# Altium PCB GANDHVEDH_Ammonia.PcbDoc (part 2 of 2)
Units mil, origin at the board's own origin, x right, y up, seen from the top; angles counter-clockwise.
Board outline 3700.79 x 3700.79 mil, 2 copper layers (Top Layer, Bottom Layer); 98 components, 57 nets, 314 pads, 1596 vias.
Unrouted connection lines stored in the file: 13.
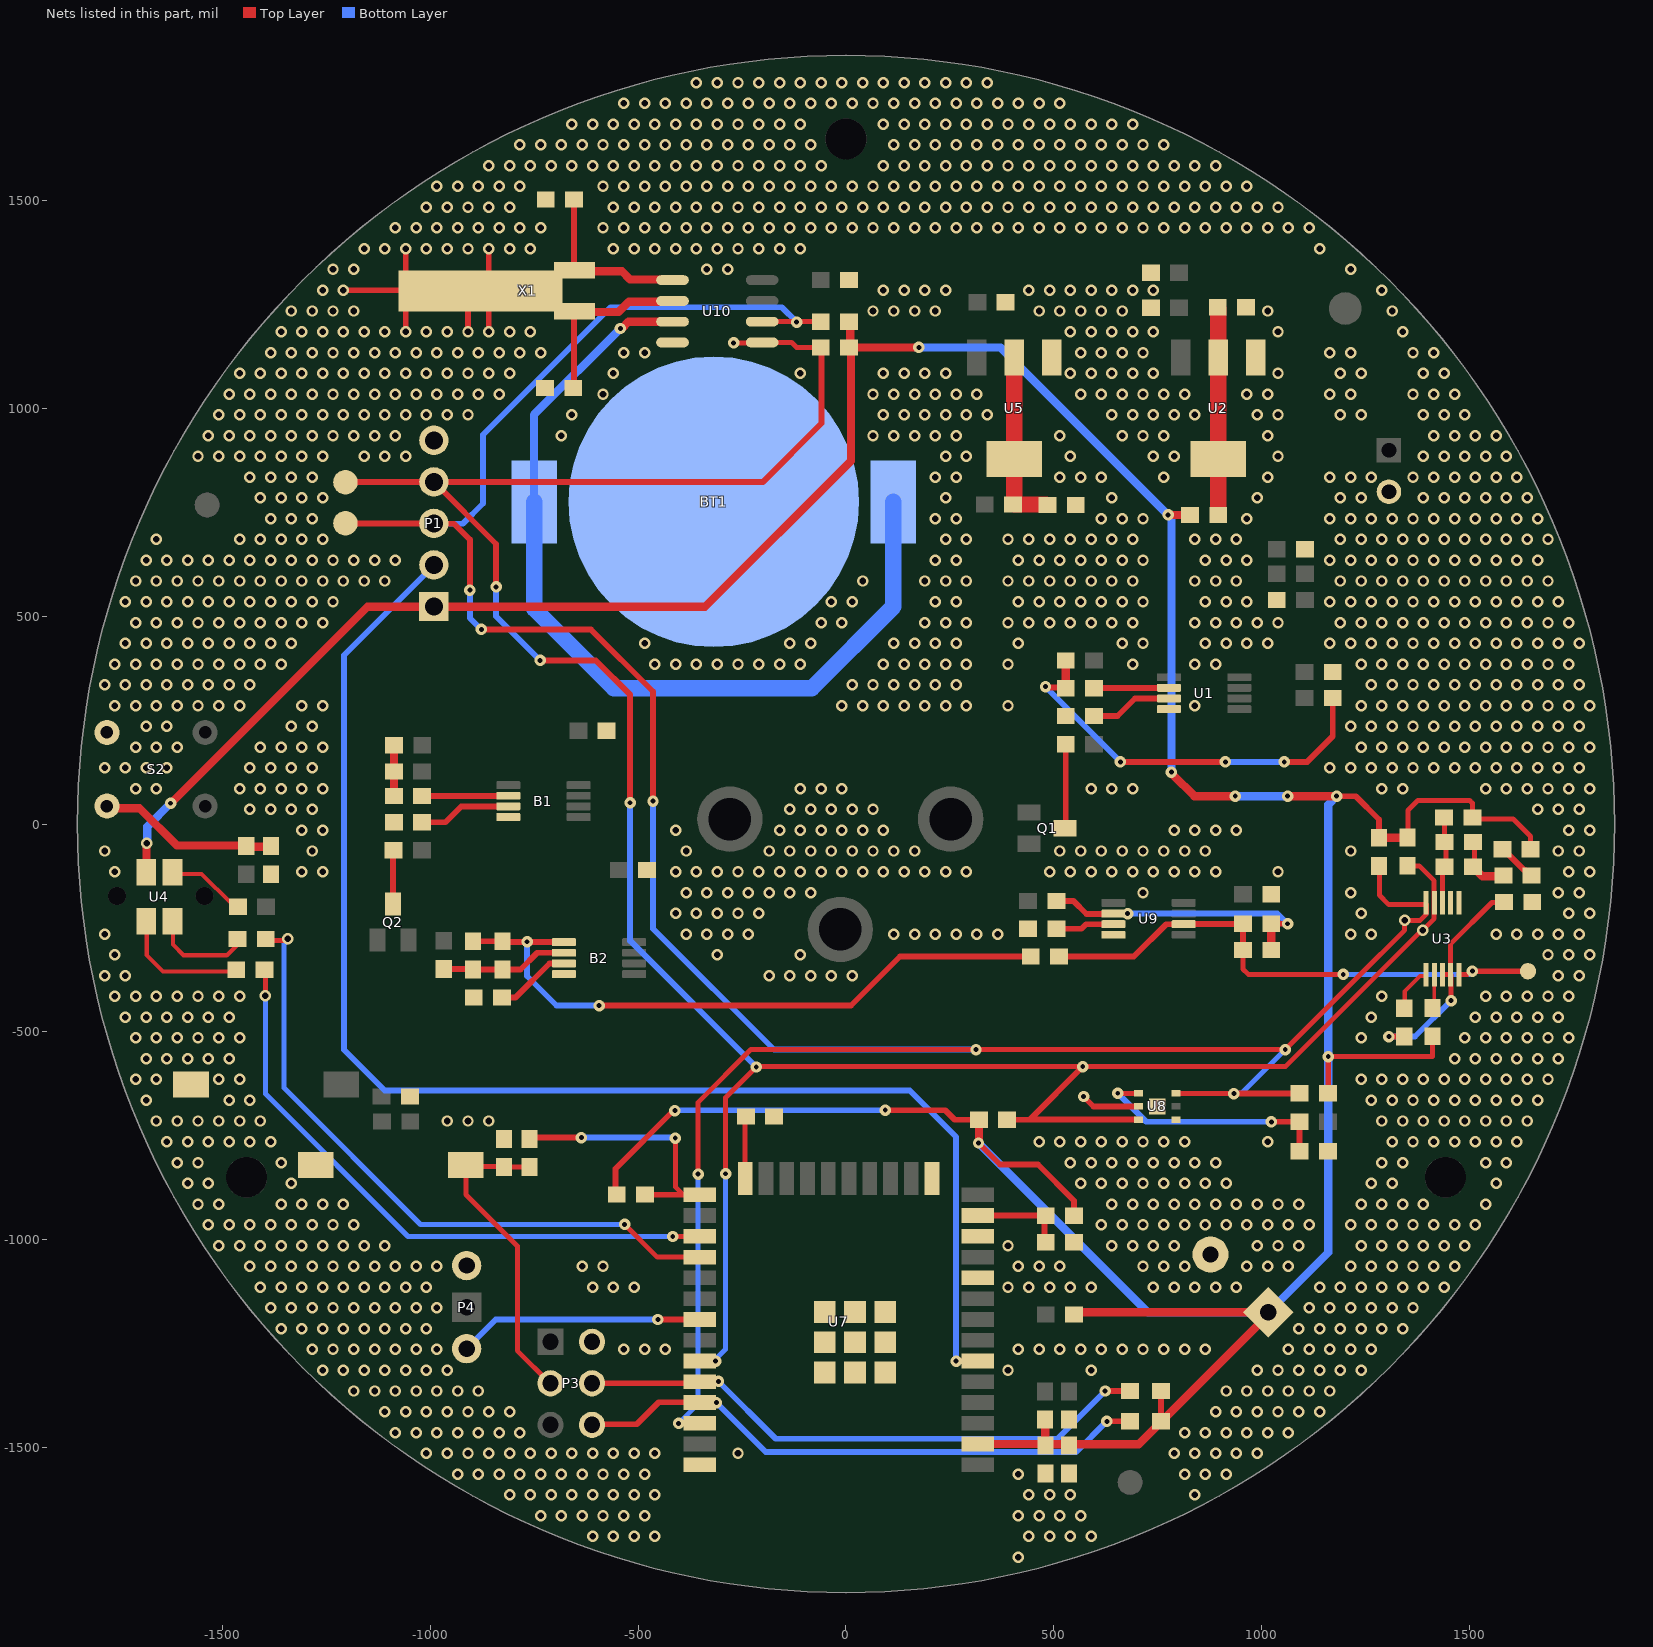
[diagram p2: the nets of this part, all layers, seen from the top]

## Via types
v1: diameter 27.56, hole 15.75, Top Layer to Bottom Layer, tented both sides, 1503 vias
v2: diameter 27.56, hole 11.81, Top Layer to Bottom Layer, tented both sides, 81 vias
v3: diameter 23.62, hole 7.87, Top Layer to Bottom Layer, 12 vias

## Nets (pads, with @x,y where several pads share a name; then routed paths per layer and width w, separated by ;. In a path a pad name is that pad's centre, name@x,y a point inside that pad or via, vN(x,y) a via of type N, cw(c..) or ccw(c..) an arc to the next point about the centre after c; other vN are vias at no path point) (continued)
GND_POWER: B1.4 B2.4 BT1.2 C1.1 C2.1 C3.1 C4.2 C5.2 C8.1 C9.2 C11.2 C13.2 C14.1 C15.1 C16.1 C17.1 C18.2 C19.1 C20.1 C21.1 C23.1 C24.1 C26.2 C27.2 C28.2 C29.2 FB2.2 P1.1 P2.2 P3.5 P4.3 R1.2 R8.2 R12.2 R18.2 R22.2 R27.1 R37.2 S1.2 S2.4 S3.2 U1.4 U2.1 U3.6 U3.7 U5.1 U7.15 U7.38 U7.39 U8.2 U8.4 U8.7 U9.4 U10.4 X1.3 | length 1098.8
  Top Layer w7.87: R12.2@1652.45,-188 R12.2@1653,-188.55
  Top Layer w14: v1(-1210,1285) X1.3@-1062,1285 ; v1(-1060,1185) -1060,1283 X1.3@-1062,1285 ; v1(-1060,1385) -1060,1287 X1.3@-1062,1285 ; v1(-910,1185) -910,1253.39 X1.3@-879.92,1283.46 ; v1(-860,1185) -860,1263.54 X1.3@-879.92,1283.46 ; v1(-860,1385) -860,1303.39 X1.3@-879.92,1283.46 ; v2(572,-656) 596,-680 U8.2@703.72,-680 ; C1.1@1580.05,-60.9 1582.05,-60.9 1632.55,-111.4 1638.03,-111.4 FB2.2@1650.53,-123.9 ; X1.3@-1062,1285 -881.46,1285 X1.3@-879.92,1283.46
  other v1: 415,-1765 -610,-1715 -560,-1715 -510,-1715 -460,-1715 440,-1715 490,-1715 540,-1715 590,-1715 -735,-1665 -685,-1665 -635,-1665 -585,-1665 -535,-1665 -485,-1665 415,-1665 465,-1665 515,-1665 565,-1665 -810,-1615 -760,-1615 -710,-1615 -660,-1615 -610,-1615 -560,-1615 -510,-1615 -460,-1615 440,-1615 490,-1615 540,-1615 840,-1615 -935,-1565 -885,-1565 -835,-1565 -785,-1565 -735,-1565 -685,-1565 -635,-1565 -585,-1565 -535,-1565 -485,-1565 415,-1565 815,-1565 865,-1565 915,-1565 -1010,-1515 -960,-1515 -910,-1515 -860,-1515 -810,-1515 -760,-1515 -710,-1515 -660,-1515 -610,-1515 -560,-1515 -510,-1515 -460,-1515 -260,-1515 790,-1515 840,-1515 890,-1515 940,-1515 990,-1515 -1085,-1465 -1035,-1465 -985,-1465 -935,-1465 -885,-1465 -835,-1465 -785,-1465 815,-1465 865,-1465 915,-1465 965,-1465 1015,-1465 1065,-1465 -1110,-1415 -1060,-1415 -1010,-1415 -960,-1415 -910,-1415 -860,-1415 -810,-1415 890,-1415 940,-1415 990,-1415 1040,-1415 1090,-1415 1140,-1415 -1185,-1365 -1135,-1365 -1085,-1365 -1035,-1365 -985,-1365 -935,-1365 -885,-1365 915,-1365 965,-1365 1015,-1365 1065,-1365 1115,-1365 1165,-1365 -1260,-1315 -1210,-1315 -1160,-1315 -1110,-1315 -1060,-1315 -1010,-1315 -960,-1315 390,-1315 590,-1315 990,-1315 1040,-1315 1090,-1315 1140,-1315 1190,-1315 1240,-1315 -1285,-1265 -1235,-1265 -1185,-1265 -1135,-1265 -1085,-1265 -1035,-1265 -985,-1265 -535,-1265 -485,-1265 -435,-1265 415,-1265 465,-1265 515,-1265 565,-1265 615,-1265 665,-1265 715,-1265 765,-1265 815,-1265 865,-1265 1065,-1265 1115,-1265 1165,-1265 1215,-1265 1265,-1265 -1360,-1215 -1310,-1215 -1260,-1215 -1210,-1215 -1160,-1215 -1110,-1215 -1060,-1215 -1010,-1215 1090,-1215 1140,-1215 1190,-1215 1240,-1215 1290,-1215 1340,-1215 -1385,-1165 -1335,-1165 -1285,-1165 -1235,-1165 -1185,-1165 -1135,-1165 -1085,-1165 -1035,-1165 -985,-1165 1115,-1165 1165,-1165 1215,-1165 1265,-1165 1315,-1165 1365,-1165 -1410,-1115 -1360,-1115 -1310,-1115 -1260,-1115 -1210,-1115 -1160,-1115 -1110,-1115 -1060,-1115 -1010,-1115 -610,-1115 -560,-1115 -510,-1115 390,-1115 440,-1115 490,-1115 540,-1115 590,-1115 740,-1115 790,-1115 840,-1115 890,-1115 940,-1115 1140,-1115 1190,-1115 1240,-1115 1290,-1115 1340,-1115 1390,-1115 1440,-1115 -1435,-1065 -1385,-1065 -1335,-1065 -1285,-1065 -1235,-1065 -1185,-1065 -1135,-1065 -1085,-1065 -1035,-1065 -985,-1065 -635,-1065 -585,-1065 415,-1065 465,-1065 515,-1065 715,-1065 765,-1065 815,-1065 965,-1065 1015,-1065 1065,-1065 1215,-1065 1265,-1065 1315,-1065 1365,-1065 1415,-1065 1465,-1065 -1510,-1015 -1460,-1015 -1410,-1015 -1360,-1015 -1310,-1015 -1260,-1015 -1210,-1015 -1160,-1015 -1110,-1015 390,-1015 640,-1015 690,-1015 740,-1015 790,-1015 990,-1015 1040,-1015 1090,-1015 1240,-1015 1290,-1015 1340,-1015 1390,-1015 1440,-1015 1490,-1015 -1535,-965 -1485,-965 -1435,-965 -1385,-965 -1335,-965 -1285,-965 -1235,-965 -1185,-965 615,-965 665,-965 715,-965 765,-965 815,-965 865,-965 915,-965 965,-965 1015,-965 1065,-965 1115,-965 1215,-965 1265,-965 1315,-965 1365,-965 1415,-965 1465,-965 1515,-965 -1560,-915 -1510,-915 -1360,-915 -1310,-915 -1260,-915 -1210,-915 640,-915 690,-915 740,-915 790,-915 840,-915 890,-915 940,-915 990,-915 1040,-915 1090,-915 1240,-915 1290,-915 1340,-915 1390,-915 1540,-915 -1585,-865 -1535,-865 -1335,-865 565,-865 615,-865 665,-865 715,-865 765,-865 815,-865 865,-865 915,-865 1265,-865 1315,-865 1565,-865 -1610,-815 -1560,-815 -1360,-815 540,-815 590,-815 640,-815 690,-815 740,-815 790,-815 840,-815 890,-815 1290,-815 1340,-815 1540,-815 1590,-815 -1635,-765 -1585,-765 -1535,-765 -1485,-765 -1435,-765 -1385,-765 465,-765 515,-765 565,-765 615,-765 665,-765 715,-765 765,-765 815,-765 1015,-765 1315,-765 1365,-765 1415,-765 1465,-765 1515,-765 1565,-765 1615,-765 -1660,-715 -1610,-715 -1560,-715 -1510,-715 -1460,-715 -1410,-715 -960,-715 -910,-715 -860,-715 1290,-715 1340,-715 1390,-715 1440,-715 1490,-715 1540,-715 1590,-715 1640,-715 -1685,-665 -1485,-665 -1435,-665 1265,-665 1315,-665 1365,-665 1415,-665 1465,-665 1515,-665 1565,-665 1615,-665 1665,-665 -1710,-615 -1660,-615 -1510,-615 -1460,-615 1240,-615 1290,-615 1340,-615 1390,-615 1440,-615 1490,-615 1540,-615 1590,-615 1640,-615 1690,-615 -1685,-565 -1635,-565 -1585,-565 -1535,-565 -1485,-565 1465,-565 1515,-565 1565,-565 1615,-565 1665,-565 1715,-565 -1710,-515 -1660,-515 -1610,-515 -1560,-515 -1510,-515 -1460,-515 1240,-515 1490,-515 1540,-515 1590,-515 1640,-515 1690,-515 1740,-515 -1735,-465 -1685,-465 -1635,-465 -1585,-465 -1535,-465 -1485,-465 1265,-465 1515,-465 1565,-465 1615,-465 1665,-465 1715,-465 -1760,-415 -1710,-415 -1660,-415 -1610,-415 -1560,-415 -1510,-415 -1460,-415 1290,-415 1540,-415 1590,-415 1640,-415 1690,-415 1740,-415 -1785,-365 -1735,-365 -185,-365 -135,-365 -85,-365 -35,-365 15,-365 1715,-365 1765,-365 -1760,-315 -310,-315 -110,-315 1690,-315 1740,-315 1790,-315 -1785,-265 -385,-265 -335,-265 -285,-265 -235,-265 115,-265 165,-265 215,-265 265,-265 315,-265 365,-265 1215,-265 1265,-265 1565,-265 1615,-265 1665,-265 1715,-265 1765,-265 -410,-215 -360,-215 -310,-215 -260,-215 -210,-215 1240,-215 1740,-215 1790,-215 -385,-165 -335,-165 -285,-165 -235,-165 -185,-165 -135,-165 -85,-165 715,-165 1215,-165 1715,-165 1765,-165 -1760,-115 -1310,-115 -1260,-115 -410,-115 -360,-115 -310,-115 -260,-115 -210,-115 -160,-115 -110,-115 -60,-115 -10,-115 40,-115 90,-115 140,-115 190,-115 240,-115 290,-115 490,-115 540,-115 590,-115 640,-115 690,-115 740,-115 790,-115 840,-115 890,-115 1040,-115 1740,-115 1790,-115 -1785,-65 -1285,-65 -385,-65 -185,-65 -135,-65 -85,-65 -35,-65 15,-65 65,-65 115,-65 165,-65 515,-65 565,-65 615,-65 665,-65 715,-65 765,-65 815,-65 865,-65 1215,-65 1715,-65 1765,-65 -1310,-15 -1260,-15 -410,-15 -160,-15 -110,-15 -60,-15 -10,-15 40,-15 90,-15 790,-15 840,-15 890,-15 940,-15 1740,-15 1790,-15 -1435,35 -1385,35 -1335,35 -1285,35 -135,35 -85,35 -35,35 15,35 65,35 1665,35 1715,35 1765,35 -1710,85 -1660,85 -1460,85 -1410,85 -1360,85 -1310,85 -1260,85 -110,85 -60,85 -10,85 590,85 640,85 690,85 1290,85 1340,85 1540,85 1590,85 1640,85 1690,85 1740,85 1790,85 -1785,135 -1735,135 -1685,135 -1635,135 -1435,135 -1385,135 -1335,135 -1285,135 1165,135 1215,135 1265,135 1315,135 1365,135 1415,135 1465,135 1515,135 1565,135 1615,135 1665,135 1715,135 1765,135 -1710,185 -1660,185 -1610,185 -1410,185 -1360,185 -1310,185 -1260,185 1240,185 1290,185 1340,185 1390,185 1440,185 1490,185 1540,185 1590,185 1640,185 1690,185 1740,185 1790,185 -1685,235 -1635,235 -1335,235 -1285,235 1215,235 1265,235 1315,235 1365,235 1415,235 1465,235 1515,235 1565,235 1615,235 1665,235 1715,235 1765,235 -1760,285 -1710,285 -1660,285 -1610,285 -1560,285 -1510,285 -1460,285 -1310,285 -1260,285 -10,285 40,285 90,285 140,285 190,285 240,285 290,285 390,285 840,285 1240,285 1290,285 1340,285 1390,285 1440,285 1490,285 1540,285 1590,285 1640,285 1690,285 1740,285 1790,285 -1785,335 -1735,335 -1685,335 -1635,335 -1585,335 -1535,335 -1485,335 -1435,335 15,335 65,335 115,335 165,335 215,335 265,335 1265,335 1315,335 1365,335 1415,335 1465,335 1515,335 1565,335 1615,335 1665,335 1715,335 1765,335 -1760,385 -1710,385 -1660,385 -1610,385 -1560,385 -1510,385 -1460,385 -1410,385 -1360,385 -460,385 -410,385 -360,385 -310,385 -260,385 -210,385 -160,385 -110,385 90,385 140,385 190,385 240,385 290,385 390,385 690,385 840,385 890,385 1240,385 1290,385 1340,385 1390,385 1440,385 1490,385 1540,385 1590,385 1640,385 1690,385 1740,385 -1735,435 -1685,435 -1635,435 -1585,435 -1535,435 -1485,435 -1435,435 -1385,435 -1335,435 -485,435 -135,435 -85,435 115,435 165,435 215,435 265,435 415,435 665,435 715,435 865,435 915,435 965,435 1015,435 1165,435 1215,435 1265,435 1315,435 1365,435 1415,435 1465,435 1515,435 1565,435 1615,435 1665,435 1715,435 1765,435 -1710,485 -1660,485 -1610,485 -1560,485 -1510,485 -1460,485 -1410,485 -1360,485 -1310,485 -1260,485 -60,485 -10,485 190,485 240,485 290,485 390,485 440,485 490,485 540,485 590,485 640,485 690,485 840,485 890,485 940,485 990,485 1040,485 1190,485 1240,485 1290,485 1340,485 1390,485 1440,485 1490,485 1540,485 1590,485 1640,485 1690,485 1740,485 -1735,535 -1685,535 -1635,535 -1585,535 -1535,535 -1485,535 -1435,535 -1385,535 -1335,535 -1285,535 -1235,535 -35,535 15,535 215,535 265,535 415,535 465,535 515,535 565,535 615,535 665,535 715,535 865,535 915,535 965,535 1165,535 1215,535 1265,535 1315,535 1365,535 1415,535 1465,535 1515,535 1565,535 1615,535 1665,535 1715,535 -1710,585 -1660,585 -1610,585 -1560,585 -1510,585 -1460,585 -1410,585 -1360,585 -1310,585 -1260,585 -1210,585 -1160,585 -1110,585 40,585 190,585 240,585 290,585 390,585 440,585 490,585 540,585 590,585 640,585 690,585 840,585 890,585 940,585 1190,585 1240,585 1290,585 1340,585 1390,585 1440,585 1490,585 1540,585 1590,585 1640,585 1690,585 -1685,635 -1635,635 -1585,635 -1535,635 -1485,635 -1435,635 -1385,635 -1335,635 -1285,635 -1235,635 -1185,635 -1135,635 -1085,635 215,635 265,635 415,635 465,635 515,635 565,635 615,635 665,635 715,635 865,635 915,635 965,635 1165,635 1215,635 1265,635 1315,635 1365,635 1415,635 1465,635 1515,635 1565,635 1615,635 1665,635 -1660,685 -1460,685 -1410,685 -1360,685 -1310,685 -1260,685 240,685 290,685 390,685 440,685 490,685 540,685 590,685 640,685 690,685 840,685 890,685 940,685 1190,685 1240,685 1290,685 1340,685 1390,685 1440,685 1490,685 1540,685 1590,685 1640,685 1690,685 -1385,735 -1335,735 -1285,735 215,735 265,735 615,735 665,735 715,735 965,735 1165,735 1215,735 1265,735 1315,735 1365,735 1415,735 1465,735 1515,735 1565,735 1615,735 1665,735 -1410,785 -1360,785 -1310,785 -1260,785 240,785 640,785 990,785 1190,785 1240,785 1390,785 1440,785 1490,785 1540,785 1590,785 1640,785 -1435,835 -1385,835 -1335,835 -1285,835 215,835 265,835 515,835 565,835 615,835 765,835 1015,835 1165,835 1215,835 1265,835 1365,835 1415,835 1465,835 1515,835 1565,835 1615,835 -1560,885 -1510,885 -1460,885 -1410,885 -1360,885 -1310,885 -1260,885 -1160,885 -1110,885 -1060,885 240,885 290,885 540,885 740,885 790,885 1040,885 1390,885 1440,885 1490,885 1540,885 1590,885 -1535,935 -1485,935 -1435,935 -1385,935 -1335,935 -1285,935 -1235,935 -1185,935 -1135,935 -1085,935 -685,935 65,935 115,935 165,935 215,935 265,935 515,935 665,935 715,935 765,935 1015,935 1415,935 1465,935 1515,935 1565,935 -1510,985 -1460,985 -1410,985 -1360,985 -1310,985 -1260,985 -1210,985 -1160,985 -1110,985 -1060,985 -1010,985 -960,985 -910,985 -660,985 90,985 140,985 190,985 240,985 290,985 340,985 640,985 690,985 740,985 790,985 840,985 990,985 1040,985 1190,985 1240,985 1390,985 1440,985 1490,985 -1485,1035 -1435,1035 -1385,1035 -1335,1035 -1285,1035 -1235,1035 -1185,1035 -1135,1035 -1085,1035 -1035,1035 -985,1035 -935,1035 -885,1035 -835,1035 -585,1035 65,1035 115,1035 165,1035 215,1035 265,1035 315,1035 565,1035 615,1035 665,1035 715,1035 765,1035 815,1035 965,1035 1015,1035 1165,1035 1215,1035 1365,1035 1415,1035 1465,1035 -1460,1085 -1410,1085 -1360,1085 -1310,1085 -1260,1085 -1210,1085 -1160,1085 -1110,1085 -1060,1085 -1010,1085 -960,1085 -910,1085 -860,1085 -810,1085 -560,1085 -110,1085 90,1085 140,1085 190,1085 240,1085 540,1085 590,1085 640,1085 690,1085 740,1085 1040,1085 1190,1085 1240,1085 1390,1085 1440,1085 -1385,1135 -1335,1135 -1285,1135 -1235,1135 -1185,1135 -1135,1135 -1085,1135 -1035,1135 -985,1135 -935,1135 -885,1135 -835,1135 -785,1135 -735,1135 -535,1135 -485,1135 565,1135 615,1135 665,1135 715,1135 1165,1135 1215,1135 1365,1135 1415,1135 -1360,1185 -1310,1185 -1260,1185 -1210,1185 -1160,1185 -1110,1185 -1010,1185 -960,1185 -810,1185 -760,1185 540,1185 590,1185 640,1185 690,1185 740,1185 1040,1185 1340,1185 -1335,1235 -1285,1235 -1235,1235 -1185,1235 65,1235 115,1235 165,1235 215,1235 465,1235 515,1235 565,1235 615,1235 665,1235 1015,1235 1315,1235 -1260,1285 90,1285 140,1285 190,1285 240,1285 440,1285 490,1285 540,1285 590,1285 640,1285 690,1285 740,1285 1290,1285 -1235,1335 -1185,1335 -335,1335 -285,1335 1215,1335 -1160,1385 -1110,1385 -1010,1385 -960,1385 -910,1385 -810,1385 -760,1385 -560,1385 -510,1385 -460,1385 -410,1385 -360,1385 -310,1385 -260,1385 -210,1385 -160,1385 -110,1385 1140,1385 -1085,1435 -1035,1435 -985,1435 -935,1435 -885,1435 -835,1435 -785,1435 -735,1435 -585,1435 -535,1435 -485,1435 -435,1435 -385,1435 -335,1435 -285,1435 -235,1435 -185,1435 -135,1435 -85,1435 -35,1435 15,1435 65,1435 115,1435 165,1435 215,1435 265,1435 315,1435 365,1435 415,1435 465,1435 515,1435 565,1435 615,1435 665,1435 715,1435 765,1435 815,1435 865,1435 915,1435 965,1435 1015,1435 1065,1435 1115,1435 -1010,1485 -960,1485 -910,1485 -860,1485 -810,1485 -560,1485 -510,1485 -460,1485 -410,1485 -360,1485 -310,1485 -260,1485 -210,1485 -160,1485 -110,1485 -60,1485 -10,1485 40,1485 90,1485 140,1485 190,1485 240,1485 290,1485 340,1485 390,1485 440,1485 490,1485 540,1485 590,1485 640,1485 690,1485 740,1485 790,1485 840,1485 890,1485 940,1485 990,1485 1040,1485 -985,1535 -935,1535 -885,1535 -835,1535 -785,1535 -585,1535 -535,1535 -485,1535 -435,1535 -385,1535 -335,1535 -285,1535 -235,1535 -185,1535 -135,1535 -85,1535 -35,1535 15,1535 65,1535 115,1535 165,1535 215,1535 265,1535 315,1535 365,1535 415,1535 465,1535 515,1535 565,1535 615,1535 665,1535 715,1535 765,1535 815,1535 865,1535 915,1535 965,1535 -860,1585 -810,1585 -760,1585 -710,1585 -660,1585 -610,1585 -560,1585 -510,1585 -460,1585 -410,1585 -360,1585 -310,1585 -260,1585 -210,1585 -160,1585 -110,1585 -60,1585 90,1585 140,1585 190,1585 240,1585 290,1585 340,1585 390,1585 440,1585 490,1585 540,1585 590,1585 640,1585 690,1585 740,1585 790,1585 840,1585 890,1585 -785,1635 -735,1635 -685,1635 -635,1635 -585,1635 -535,1635 -485,1635 -435,1635 -385,1635 -335,1635 -285,1635 -235,1635 -185,1635 -135,1635 -85,1635 115,1635 165,1635 215,1635 265,1635 315,1635 365,1635 415,1635 465,1635 515,1635 565,1635 615,1635 665,1635 715,1635 765,1635 -660,1685 -610,1685 -560,1685 -510,1685 -460,1685 -410,1685 -360,1685 -310,1685 -260,1685 -210,1685 -160,1685 -110,1685 90,1685 140,1685 190,1685 240,1685 290,1685 340,1685 390,1685 440,1685 490,1685 540,1685 590,1685 640,1685 690,1685 -535,1735 -485,1735 -435,1735 -385,1735 -335,1735 -285,1735 -235,1735 -185,1735 -135,1735 -85,1735 -35,1735 15,1735 65,1735 115,1735 165,1735 215,1735 265,1735 315,1735 365,1735 415,1735 465,1735 515,1735 -360,1785 -310,1785 -260,1785 -210,1785 -160,1785 -110,1785 -60,1785 -10,1785 40,1785 90,1785 140,1785 190,1785 240,1785 290,1785 340,1785
GREEN_I: R17.1 U7.27 | length 1487.2
  Top Layer w12: R17.1@-1400,-351 -1397.64,-353.36 v1(-1397.64,-413.39) ; v2@-416.84,-992.84 -352.56,-992.84 U7.27@-352.4,-992.69
  Top Layer w14: v2(-417,-993) v2@-416.84,-992.84
  Bottom Layer w12: v1(-1397.64,-413.39) -1397.64,-649.61 -1054.24,-993 v2(-417,-993)
HDS2080_ON: U7.12
INT: P1.4 U7.6 | length 3408.5
  Top Layer w12: v2(265,-1293) 265.16,-1292.84 316.73,-1292.84 U7.6@316.89,-1292.69
  Bottom Layer w14: P1.4@-992,623 -1039.42,575.58 -1208.66,406.34 -1208.66,-543.31 -1110.24,-641.73 153.54,-641.73 265,-753.19 v2(265,-1293)
IO0: R24.2 R30.2 U7.25 | length 584.8
  Top Layer w12: v2(-411,-756) -411,-873.34 -392,-892.34
  Top Layer w14: R30.2@-762,-755 v2(-637,-755) ; R24.2@-481,-892 -480.66,-892.34 -392,-892.34
  Bottom Layer w14: v2(-637,-755) -412,-755 v2(-411,-756)
IO_F: C19.2 P3.4 R30.1 S3.1 | length 765.2
  Top Layer w12: S3.1@-915.29,-821 -915.29,-891.8 -791.34,-1015.75 -791.34,-1267.72 P3.4@-712.11,-1346.95 ; S3.1@-914.29,-825 -822.53,-825 -822,-825.53 -764.94,-825.53 R30.1@-761,-821.59
NetB1_2: B1.2 R36.1 | length 207.6
  Top Layer w14: R36.1@-1020.31,67.31 -1020.02,67.61 -813.29,67.61 B1.2@-812.99,67.91
NetB1_3: B1.3 R22.1 | length 223.1
  Top Layer w14: R22.1@-1020.31,4.32 -964.18,4.32 -926.18,42.32 B1.3@-812.99,42.32
NetB2_1: B2.1 C25.2 R9.2 R40.1 | length 1592.9
  Top Layer w14: C25.2@-897.64,-282.34 -897.58,-282.39 R40.1@-826.77,-282.39 -824.72,-284.45 B2.1@-679.13,-284.45 ; v2(-594.49,-437.01) 11.99,-437.01 130.1,-318.9 R9.2@444.88,-318.9
  Bottom Layer w14: v2(-767.72,-283.46) -767.72,-366.14 -696.85,-437.01 v2(-594.49,-437.01)
NetB2_2: B2.2 C25.1 R39.1 R40.2 | length 306.7
  Top Layer w14: R39.1@-968.5,-348.96 -899.07,-348.96 C25.1@-897.64,-350.39 R40.2@-826.77,-350.39 -783.46,-350.39 -743.11,-310.04 B2.2@-679.13,-310.04
NetB2_3: B2.3 R37.1 | length 182.9
  Top Layer w14: R37.1@-828.2,-417.32 -795.28,-417.32 -713.58,-335.63 B2.3@-679.13,-335.63
NetBT1_1: BT1.1 U10.3 | length 2170.7
  Top Layer w14: v2(-543.31,1192.91) v2@-539.64,1192.91
  Top Layer w19.68: v2@-539.64,1192.91 -523.26,1209.29 U10.3@-417.61,1209.29
  Bottom Layer w19.68: BT1.1@-750.79,775.59 -750.79,985.43 v2(-543.31,1192.91)
  Bottom Layer w39.37: BT1.1@-750.79,775.59 -750.79,518.5 -559.06,326.77 -82.68,326.77 114.17,523.62 BT1.1@114.17,775.59
NetC3_2: C3.2 R11.2 U2.2 U2.4 | length 500.9
  Top Layer w29.53: C3.2@894.13,1240.09 C3.2@896.13,1240.09
  Top Layer w39.37: C3.2@896,1242 U2.2@896,1123.09 U2.4@896,879 896,744.19 896.19,744 R11.2@897,744
NetC6_1: C6.1 C7.1 FB1.1 U3.8 | length 205.9
  Top Layer w7.87: C6.1@1436,-113 C6.1@1442,-107
  Top Layer w11.81: U3.8@1436,-190 C6.1@1436,-113 ; FB1.1@1441,12 1441,-46 C7.1@1442,-47 ; C6.1@1442,-107 C6.1@1444.47,-104.53
  Top Layer w12: C6.1@1444.47,-104.53 C7.1@1444.47,-47
NetC6_2: C6.2 C7.2 FB2.1 | length 143.4
  Top Layer w10: C7.2@1510.45,-47 C7.2@1513,-49.55
  Top Layer w12: C6.2@1513,-104.45 C7.2@1513,-49.55
  Top Layer w19.68: C6.2@1509.03,-103 1511.03,-103 1520.69,-112.66 1520.69,-114.45 1532.22,-125.98 1580.39,-125.98 FB2.1@1582.47,-123.9
NetC10_1: C10.1 R5.1 R6.2 | length 1001.6
  Top Layer w14: v2(480.31,330.71) 482.28,328.74 527.02,328.74 R6.2@528.99,326.77 ; v2(660.74,149.61) v2(913.39,149.61) ; v2(1055.12,149.61) 1110.24,149.61 1171.82,211.19 C10.1@1171.82,303.15
  Top Layer w19.68: R6.2@528.99,326.77 R5.1@528.99,393.7
  Bottom Layer w14: v2(480.31,330.71) 480.31,330.37 660.74,149.95 v2(660.74,149.61) ; v2(913.39,149.61) v2(1055.12,149.61)
NetC11_1: C11.1 R19.2 U5.2 U5.4 | length 431.5
  Top Layer w39.37: U5.2@404.99,1123.21 U5.4@404.99,879.12 404.99,769.17 479.36,769.17 480.36,768.17 C11.1@481.99,768.17
NetC12_1: C12.1 R20.1 R21.2 U9.2 | length 682.5
  Top Layer w14: R20.1@506.44,-185.04 547.24,-185.04 578.74,-216.54 642.72,-216.54 U9.2@643.7,-215.55 v2(678.07,-215.55) ; C12.1@1023.65,-240.16 v2(1062.99,-240.16)
  Top Layer w19.68: R21.2@1023.62,-303.15 C12.1@1023.65,-240.16
  Bottom Layer w14: v2(678.07,-215.55) 1038.39,-215.55 v2(1062.99,-240.16)
NetC18_1: C18.1 R28.1 U8.1 | length 586.8
  Top Layer w12: v2(654.25,-648.25) 703.47,-648.25 U8.1@703.72,-648.5
  Top Layer w14: v2(1024,-717) R28.1@1092,-717 C18.1@1092,-788
  Bottom Layer w14: v2(654.25,-648.25) 723,-717 v2(1024,-717)
NetC20_2: C20.2 R31.1 S2.2 | length 410.1
  Top Layer w19.68: S2.2@-1777.1,38 -1701,38 -1611,-52 R31.1@-1456.41,-52 ; R31.1@-1432.3,-54.7 -1389.77,-54.7 C20.2@-1383,-61.47
NetC22_1: C22.1 R33.1 R36.2 | length 122.1
  Top Layer w19.68: R33.1@-1088.32,126.37 C22.1@-1088.34,189.36 ; R36.2@-1088.32,67.31 R33.1@-1088.32,126.37
NetC23_2: C23.2 U10.1 X1.1 | length 418.6
  Top Layer w14: X1.1@-654.7,1330.74 C23.2@-654.7,1503.29
  Top Layer w19.68: X1.1@-654.73,1330.72 -539.38,1330.72 -519.68,1311.02 -449.68,1311.02 -448.7,1310.04 -418.36,1310.04 U10.1@-417.61,1309.29
NetC24_2: C24.2 U10.2 X1.2 | length 434
  Top Layer w12: U10.2@-419.83,1261.52 U10.2@-417.61,1259.29
  Top Layer w14: C24.2@-656.7,1049.29 -654.73,1051.26 X1.2@-654.73,1232.29 ; U10.2@-423.89,1257.45 U10.2@-419.83,1261.52
  Top Layer w19.68: X1.2@-654.73,1232.29 -547.24,1232.29 -522.08,1257.45 U10.2@-423.89,1257.45
NetQ1_3: Q1.3 R16.2 | length 202.5
  Top Layer w14: Q1.3@527.56,-9.84 528.99,-8.41 R16.2@528.99,192.04
NetQ2_3: Q2.3 R38.2 | length 130.5
  Top Layer w14: Q2.3@-1090.55,-192.91 -1090.55,-64.43 R38.2@-1089.12,-62.99
NetR1_1: R1.1 U1.3 | length 198.1
  Top Layer w14: R1.1@596.99,259.84 653.54,259.84 695.87,302.17 U1.3@777.56,302.17
NetR2_2: R2.2 U3.2 | length 87.9
  Top Layer w7.87: R2.2@1412,-442.55 1416,-438.55 U3.2@1416,-362
  Top Layer w10: R2.2@1413,-455.41 R2.2@1417,-451.41
NetR6_1: R6.1 U1.2 | length 181
  Top Layer w14: R6.1@596.99,326.77 597.48,327.26 777.07,327.26 U1.2@777.56,327.76
NetR7_1: R7.1 U3.1 | length 119.6
  Top Layer w10: R7.1@1345,-455.82 1345,-403 1382,-366 U3.1@1396.5,-366
NetR7_2: R7.2 R12.1 U3.3 U3.4 | length 548.6
  Top Layer w11.81: U3.3@1436,-362.61 U3.4@1455.69,-362.61 1455.69,-288.41 1555.12,-188.98 1583.02,-188.98 R12.1@1584,-188 ; v2@1456.19,-424.69 U3.4@1456.19,-363.12
  Top Layer w14: v2(1307.09,-511.81) 1343.6,-511.81 R7.2@1344,-511.41 ; v2@1456.19,-424.69 v2(1456.69,-425.2)
  Bottom Layer w14: v2(1307.09,-511.81) 1370.08,-511.81 v2(1456.69,-425.2)
NetR8_1: R8.1 U9.3 | length 141.7
  Top Layer w14: R8.1@506.44,-251.97 567.16,-251.97 577.99,-241.14 U9.3@643.7,-241.14
NetR13_2: R13.2 U4.1 | length 205.6
  Top Layer w10: U4.1@-1625.78,-120 -1551.43,-120 -1479.83,-191.6 -1465.99,-191.6 R13.2@-1454.59,-203
NetR15_2: R15.2 U4.4 | length 242.2
  Top Layer w10: U4.4@-1620.5,-238.31 -1620.5,-290.5 -1595,-316 -1490.59,-316 R15.2@-1455.59,-281
NetR17_2: R17.2 U4.3 | length 317.8
  Top Layer w10: U4.3@-1683.5,-239 -1683.5,-315.5 -1644,-355 R17.2@-1458.59,-355
NetR27_2: R27.2 U7.24 | length 149.8
  Top Layer w12: R27.2@-244,-704 -242.76,-705.24 U7.24@-242.76,-853.32
RED_I: R15.1 U7.28 | length 1595.1
  Top Layer w12: R15.1@-1404.41,-281 -1348.75,-281 v1(-1343.75,-276) ; v2(-533,-964) -454.31,-1042.69 U7.28@-352.4,-1042.69
  Bottom Layer w12: v1(-1343.75,-276) -1343.75,-280.21 -1353,-289.46 -1353,-635.19 -1024.19,-964 v2(-533,-964)
RGB_LED: P4.1 U7.31 | length 590.1
  Top Layer w14: v2(-452.76,-1192.91) -452.64,-1192.8 -352.52,-1192.8 U7.31@-352.4,-1192.69
  Bottom Layer w14: P4.1@-913.39,-1262.99 -843.31,-1192.91 v2(-452.76,-1192.91)
RXD: P3.3 R41.2 U7.34 | length 1402.1
  Top Layer w14: P3.3@-611.42,-1346.46 -356.17,-1346.46 U7.34@-352.4,-1342.69 -352.06,-1342.34 -307.34,-1342.34 v2(-307,-1342) ; v2(624,-1365) R41.2@684,-1365
  Bottom Layer w14: v2(-307,-1342) -169,-1480 509,-1480 v2(624,-1365)
SCL: P1.3 pad.22@-1205,724 R3.2 R29.1 R34.2 U3.10 U7.36 U8.6 U10.6 | length 7311.9
  Top Layer w10: U3.10@1398,-216 U3.10@1398,-194
  Top Layer w11.81: R3.2@1284,-96.59 1284,-171 1307,-194 U3.10@1398,-194 ; v1(1345,-232) 1382,-232 U3.10@1398,-216
  Top Layer w12: v2(-403,-1443) -402.84,-1442.84 -352.56,-1442.84 U7.36@-352.4,-1442.69 ; v2(-356,-843) -356,-670 -229,-543 v2(313,-543) v2(1057.47,-543) 1232.38,-368.09 1345,-255.47 v1(1345,-232) ; U10.6@-201.86,1209.29 R34.2@-63.73,1209.29 ; U8.6@794.28,-648.5 933.5,-648.5 v2(934,-649)
  Top Layer w14: pad.22@-1205,724 -1204.5,723.5 P1.3@-992.5,723.5 ; P1.3@-992.13,723.62 -991.5,723 -943.47,723 -905.51,685.04 v2(-905.51,562.99) ; v2(-877.95,468.5) -614.17,468.5 -464.57,318.9 v2(-464.57,55.12) ; v2(934,-649) 934.5,-648.5 1091.5,-648.5 R29.1@1092,-648
  Bottom Layer w12: P1.3@-992.13,723.62 P1.3@-991.63,724.12 ; v2(-403,-1443) -356,-1396 v2(-356,-843) ; v2(934,-649) 935.74,-647.26 953.21,-647.26 984.47,-616 v2(1057.47,-543)
  Bottom Layer w14: P1.3@-992,723 -922.67,723 -874.02,771.65 -874.02,937.01 -566.93,1244.09 -154.54,1244.09 v2(-118.73,1208.29) ; v2(-905.51,562.99) -905.51,496.06 v2(-877.95,468.5) ; v2(-464.57,55.12) -464.57,-251.97 -173.54,-543 v2(313,-543)
SDA: P1.2 pad.22@-1205,823 R4.2 R32.1 R35.2 U3.9 U7.33 U8.3 U10.5 | length 6606.6
  Top Layer w11.81: v2(570,-584) 1057.73,-584 1385.73,-256 v1(1388,-256) 1416,-228 1416,-137 1379.86,-100.86 R4.2@1355.99,-100.86
  Top Layer w12: v2(-290,-842) -290,-659 v2(-216,-585) -215,-584 v2(570,-584) ; v2(-270.73,1158.29) -202.86,1158.29 U10.5@-201.86,1159.29 -130.73,1159.29 -118.73,1147.29 R35.2@-63.73,1147.29 ; R32.1@388,-712 R32.1@388.5,-712.5
  Top Layer w14: pad.22@-1205,823 -200.62,823 -59.06,964.57 -59.06,1145.61 R35.2@-60.73,1147.29 ; P1.2@-992.13,823.62 -842.52,674.02 v2(-842.52,570.87) ; v2(-736.22,393.7) -602.36,393.7 -519.68,311.02 v2(-519.68,51.18) ; R32.1@388,-712 442,-712 442.25,-711.75 ; v2(570,-584) 442.25,-711.75 ; U8.3@703.72,-711.5 703.47,-711.75 442.25,-711.75
  Bottom Layer w11.81: v1@1388,-262 v1(1388,-256)
  Bottom Layer w12: v2(-314,-1293) -314,-1288.79 -290,-1264.79 v2(-290,-842)
  Bottom Layer w14: v2(-842.52,570.87) -842.52,500 v2(-736.22,393.7) ; v2(-519.68,51.18) -519.68,-281.32 v2(-216,-585)
T_ADC: R14.2 R18.1 U7.13 | length 225.2
  Top Layer w14: U7.13@316.89,-942.69 317.05,-942.84 477.84,-942.84 478,-943 R18.1@478,-1007
TGS2602_ON: U7.10
TXD: P3.1 R10.2 U7.35 | length 1398.3
  Top Layer w7.87: U7.35@-353.09,-1392 U7.35@-352.4,-1392.69
  Top Layer w14: P3.1@-611.42,-1446.46 -609.84,-1444.88 -503.94,-1444.88 -451.06,-1392 U7.35@-353.09,-1392 ; U7.35@-352.4,-1392.69 -352.24,-1392.84 -312.16,-1392.84 v2(-312,-1393) ; v2(628,-1438) R10.2@684,-1438
  Bottom Layer w14: v2(-312,-1393) -193,-1512 554,-1512 v2(628,-1438)
V3P3: C1.2 C13.1 C14.2 C15.2 FB1.2 P1.5 R2.1 R3.1 R4.1 R10.1 R11.1 R14.1 R23.1 R24.1 R25.1 R29.2 R32.2 R34.1 R35.1 R41.1 U4.2 U7.2 | length 10648.6
  Top Layer w7.87: R4.1@1352,-32.94 R4.1@1353,-32.94
  Top Layer w10: R34.1@-2.73,1195.29 R34.1@-2.73,1207.29
  Top Layer w11.81: U4.2@-1683.5,-120.2 U4.2@-1683.5,-112.32 ; v2(1161,-560) 1412,-560 R2.1@1412,-514 ; R4.1@1353,-32.94 1353,33 1377,57 1500.96,57 1507.87,50.08 1507.87,16.15 FB1.2@1508.03,16 ; FB1.2@1507.87,12 1606.11,12 1648.1,-29.99 C1.2@1648.1,-60.9
  Top Layer w14: R24.1@-555,-892 -555,-830 -415,-690 v2(-412,-690) ; R35.1@7.27,1147.29 10.27,1147.29 R35.1@11.81,1145.75 ; v2(94.49,-688.98) 238.98,-688.98 262,-712 R32.2@320,-712 ; v2@320,-768 v2(319,-768) 371,-820 462,-820 549,-907 R14.1@549,-943 ; R23.1@479,-1437 R23.1@479.5,-1437.5 ; C14.2@479.5,-1492.5 479.69,-1492.69 C14.2@480,-1493 ; R10.1@758,-1438 R41.1@758,-1365 ; R29.2@1160,-648 1161,-647 v2(1161,-560) ; v2(1181.1,66.93) 1227.07,66.93 1283,11 R3.1@1283,-30
  Top Layer w19.68: U4.2@-1683.5,-120.2 -1683.75,-119.95 -1683.75,-46.75 v1(-1683,-46) ; v2(-1626,50) -1625,50 -1152,523 -339.2,523 11.81,874.02 R35.1@11.81,1145.75 ; R35.1@10.27,1147.29 v2(175.54,1147.29) ; R34.1@10.27,1209.29 R34.1@16.27,1215.29 ; v2@320,-768 R32.2@320,-712 ; R25.1@552,-1181 557.4,-1175.6 1018.43,-1175.6 C13.1@1020.43,-1173.6 ; v2(775.59,744.09) R11.1@828.2,744.09 ; v2(783.46,124.89) 783.46,122.76 787.4,118.82 787.4,118.11 838.58,66.93 v2(937.01,66.93) ; v2(1062.99,66.93) v2(1181.1,66.93) ; R3.1@1283.59,-32.94 R4.1@1352,-32.94
  Top Layer w20: R35.1@10.27,1147.29 R34.1@10.27,1209.29 ; U7.2@316.89,-1492.69 C14.2@479.69,-1492.69 ; C14.2@479.5,-1492.5 R23.1@479.5,-1437.5 ; C14.2@480,-1493 645.86,-1493 681.8,-1493 ccw(c681.8,-1473) 682.19,-1493 cw(c684,-1585) 685.86,-1493 ccw(c686.2,-1473) 686.2,-1493 705,-1493 C13.1@1020.33,-1177.67
  Bottom Layer w14: v2(-412,-690) -410.98,-688.98 v2(94.49,-688.98)
  Bottom Layer w19.68: v1(-1683,-46) -1682,-45 -1682,-6 v2(-1626,50) ; v2(175.54,1147.29) 372.39,1147.29 v2(775.59,744.09) 783.46,736.22 v2(783.46,124.89) ; v2(319,-768) 726.6,-1175.6 C13.1@1019.43,-1175.6 ; v2(937.01,66.93) v2(1062.99,66.93) ; C13.1@1016.6,-1175.6 1161,-1031.19 v2(1161,-560)
  Bottom Layer w20: v2(1161,-560) 1161,46.83 v2(1181.1,66.93)
Vout_ADS_A0: C12.2 R9.1 R21.1 T1.1 U3.5 U9.6 | length 1311.4
  Top Layer w11.81: R21.1@955.62,-303.15 955.62,-349.32 968.3,-362 v2(1197,-362) ; U3.5@1475.37,-362.61 1496,-362.61 v2@1504.2,-354.41
  Top Layer w14: R9.1@512.88,-318.9 692.91,-318.9 770.67,-241.14 U9.6@812.99,-241.14 813.48,-240.65 955.1,-240.65 C12.2@955.59,-240.16 R21.1@955.62,-303.15 ; v2@1504.2,-354.41 v2@1504.2,-354.33 ; v2(1507.87,-354.33) T1.1@1641.73,-354.33
  Bottom Layer w11.81: v2(1197,-362) 1500.2,-362 v2@1503.94,-358.27
  Bottom Layer w14: v2@1503.94,-358.27 v2(1507.87,-354.33)
pads on no net: B1.5 B1.6 B1.7 B2.5 B2.6 B2.7 Designator6.1 Designator6.2 S2.1 S2.3 U1.1 U1.5 U1.8 U7.4 U7.5 U7.7 U7.9 U7.14 U7.16 U7.17 U7.18 U7.19 U7.20 U7.21 U7.22 U7.23 U7.26 U7.29 U7.32 U7.37 U9.1 U9.5 U9.8 U10.7

## Polygon pours and split planes (outlines as drawn)
GND_POWER on Bottom Layer "AutoNaming" (solid, remove dead copper, pour order 4): -1881,1837 1909,1837 1909,-1003 978,-1934 -811,-1934 -1881,-864
GND_POWER on Top Layer "AutoNaming" (solid, remove dead copper, pour order 8): -1158,1867 1905.89,1867 1924.5,-990 993.5,-1921 -795.5,-1921 -1945.5,-771 -1945.5,292

## Keep-outs
Keep-Out Layer:
  circle w10: c684,-1585 r73.08
  circle w10: c684,-1585 r73.08
  circle w10: c-1538,768 r73.08
  circle w10: c-1538,768 r73.08

## Other copper
Top Layer:
  rectangle net 5VCC: 1040,1301 1105,1374
  pour cut-out: 330.71,47.24
  pour cut-out: -368.73,1430.29
Bottom Layer:
  rectangle net 5VCC: 1039.86,1297.86 1105,1376
Multi-Layer:
  pour cut-out: 384,-1581.85 384,-1856.15 371.31,-1868.85 -371.69,-1868.85 -421.69,-1818.85 -421.69,-1581.85

## Silkscreen, mask and mechanical layers (free items; w line width, h text height)
Top Overlay:
  circle w10: c749,-680 r255.91
  circle w11.81: c0,0 r1842.52
  circle w10: c0,1649.33 r70.87
  circle w10: c1441.09,-851.39 r70.87
  circle w10: c-1442.91,-850.39 r70.87
  text "TP4" at 1144,1295 h39.37
  text "TP2" at -1251,794 h20 r90
  text "TP3" at -1249,691 h20 r90
  text "*" at 1341.94,-43.34 h19.68
  text "2" at -1755.91,-74.8 h30 r270
Bottom Overlay:
  circle w11.81: c0,0 r1842.52
  text "GND" at -1045.12,994.25 h39.37
  text "VILISO TECHNOLOGIES LLP" at 806,221 h60
Mechanical 1:
  circle w10: c0,0 r1850.39
Drill Drawing:
  circle w10: c-1895.54,2720.69 r28.83
  lines w10: -1924.37,2619.8 -1866.71,2619.8 -1895.54,2562.14 -1924.37,2619.8 ; -1924.37,2951.32 -1866.71,2951.32 -1866.71,3008.97 -1924.37,3008.97 -1924.37,2951.32 ; -1924.37,3081.04 -1866.71,3081.04 -1866.71,3138.7 -1924.37,3138.7 -1924.37,3081.04 ; -1924.37,3268.42 -1866.71,3268.42 -1895.54,3210.77 -1924.37,3268.42 ; -1924.37,3354.9 -1909.95,3354.9 -1895.54,3340.49 -1881.13,3354.9 -1866.71,3354.9 -1881.13,3369.32 -1866.71,3383.73 -1881.13,3383.73 -1895.54,3398.15 -1909.95,3383.73 -1924.37,3383.73 -1909.95,3369.32 -1924.37,3354.9 ; -1924.37,3470.22 -1924.37,3484.63 -1909.95,3499.04 -1924.37,3513.46 -1924.37,3527.87 -1909.95,3527.87 -1895.54,3513.46 -1881.13,3527.87 -1866.71,3527.87 -1866.71,3513.46 -1881.13,3499.04 -1866.71,3484.63 -1866.71,3470.22 -1881.13,3470.22 -1895.54,3484.63 -1909.95,3470.22 -1924.37,3470.22 ; -1924.37,3599.94 -1895.54,3614.35 -1866.71,3599.94 -1881.13,3628.77 -1866.71,3657.6 -1895.54,3643.18 -1924.37,3657.6 -1909.95,3628.77 -1924.37,3599.94 ; -1912.84,2608.27 -1878.24,2608.27 -1895.54,2573.67 -1912.84,2608.27 ; -1912.84,2962.85 -1878.24,2962.85 -1878.24,2997.44 -1912.84,2997.44 -1912.84,2962.85
  lines w15: -1976.5,2523.22 7479.12,2523.22 ; -1976.5,3690.75 7479.12,3690.75 ; -1495.76,2393.5 -1495.76,3820.47 ; -931.07,2393.5 -931.07,3820.47 ; 65.9,2393.5 65.9,3820.47 ; 507.72,2393.5 507.72,3820.47 ; 1146.66,2393.5 1146.66,3820.47 ; 2446.23,2393.5 2446.23,3820.47 ; 2960.67,2393.5 2960.67,3820.47 ; 3609.99,2393.5 3609.99,3820.47 ; 4382.17,2393.5 4382.17,3820.47 ; 5124.86,2393.5 5124.86,3820.47 ; 6282.53,2393.5 6282.53,3820.47 ; -1976.5,2393.5 7479.12,2393.5 7479.12,3820.47 -1976.5,3820.47 -1976.5,2393.5
  text "Symbol" at -1898.67,3729.66 h62.27
  text "Count" at -1456.84,3729.66 h62.27
  text "Hole Size" at -892.15,3729.66 h62.27
  text "Plated" at 104.82,3729.66 h62.27
  text "Hole Type" at 546.64,3729.66 h62.27
  text "Drill Layer Pair" at 1185.58,3729.66 h62.27
  text "Via/Pad" at 2485.14,3729.66 h62.27
  text "Pad Shape" at 2999.59,3729.66 h62.27
  text "Template" at 3648.9,3729.66 h62.27
  text "Description" at 4421.09,3729.66 h62.27
  text "Hole Tolerance (+)" at 5163.77,3729.66 h62.27
  text "Hole Tolerance (-)" at 6321.45,3729.66 h62.27
  text "2" at -1456.84,3599.94 h51.89
  text "35.43mil (0.900mm)" at -892.15,3599.94 h51.89
  text "PTH" at 104.82,3599.94 h51.89
  text "Round" at 546.64,3599.94 h51.89
  text "Top Layer - Bottom Layer" at 1185.58,3599.94 h51.89
  text "Pad" at 2485.14,3599.94 h51.89
  text "(Mixed)" at 2999.59,3599.94 h51.89
  text "(Mixed)" at 3648.9,3599.94 h51.89
  text "3" at -1456.84,3470.22 h51.89
  text "98.43mil (2.500mm)" at -892.15,3470.22 h51.89
  text "NPTH" at 104.82,3470.22 h51.89
  text "Round" at 546.64,3470.22 h51.89
  text "Top Layer - Bottom Layer" at 1185.58,3470.22 h51.89
  text "Pad" at 2485.14,3470.22 h51.89
  text "Rounded" at 2999.59,3470.22 h51.89
  text "c250hn250" at 3648.9,3470.22 h51.89
  text "3" at -1456.84,3340.49 h51.89
  text "102.36mil (2.600mm)" at -892.15,3340.49 h51.89
  text "PTH" at 104.82,3340.49 h51.89
  text "Round" at 546.64,3340.49 h51.89
  text "Top Layer - Bottom Layer" at 1185.58,3340.49 h51.89
  text "Pad" at 2485.14,3340.49 h51.89
  text "Rounded" at 2999.59,3340.49 h51.89
  text "c400h260" at 3648.9,3340.49 h51.89
  text "4" at -1456.84,3210.77 h51.89
  text "30.00mil (0.762mm)" at -892.15,3210.77 h51.89
  text "PTH" at 104.82,3210.77 h51.89
  text "Round" at 546.64,3210.77 h51.89
  text "Top Layer - Bottom Layer" at 1185.58,3210.77 h51.89
  text "Pad" at 2485.14,3210.77 h51.89
  text "Rounded" at 2999.59,3210.77 h51.89
  text "c152h76" at 3648.9,3210.77 h51.89
  text "7" at -1456.84,3081.04 h51.89
  text "43.31mil (1.100mm)" at -892.15,3081.04 h51.89
  text "PTH" at 104.82,3081.04 h51.89
  text "Round" at 546.64,3081.04 h51.89
  text "Top Layer - Bottom Layer" at 1185.58,3081.04 h51.89
  text "Pad" at 2485.14,3081.04 h51.89
  text "(Mixed)" at 2999.59,3081.04 h51.89
  text "(Mixed)" at 3648.9,3081.04 h51.89
  text "11" at -1456.84,2951.32 h51.89
  text "39.37mil (1.000mm)" at -892.15,2951.32 h51.89
  text "PTH" at 104.82,2951.32 h51.89
  text "Round" at 546.64,2951.32 h51.89
  text "Top Layer - Bottom Layer" at 1185.58,2951.32 h51.89
  text "Pad" at 2485.14,2951.32 h51.89
  text "(Mixed)" at 2999.59,2951.32 h51.89
  text "(Mixed)" at 3648.9,2951.32 h51.89
  text "12" at -1456.84,2821.59 h51.89
  text "7.87mil (0.200mm)" at -892.15,2821.59 h51.89
  text "PTH" at 104.82,2821.59 h51.89
  text "Round" at 546.64,2821.59 h51.89
  text "Top Layer - Bottom Layer" at 1185.58,2821.59 h51.89
  text "Via" at 2485.14,2821.59 h51.89
  text "Rounded" at 2999.59,2821.59 h51.89
  text "v60h20" at 3648.9,2821.59 h51.89
  text "C" at -1924.75,2811.6 h57.66
  text "81" at -1456.84,2691.87 h51.89
  text "11.81mil (0.300mm)" at -892.15,2691.87 h51.89
  text "PTH" at 104.82,2691.87 h51.89
  text "Round" at 546.64,2691.87 h51.89
  text "Top Layer - Bottom Layer" at 1185.58,2691.87 h51.89
  text "Via" at 2485.14,2691.87 h51.89
  text "Rounded" at 2999.59,2691.87 h51.89
  text "v70h30m0mx0(1)" at 3648.9,2691.87 h51.89
  text "1503" at -1456.84,2562.14 h51.89
  text "15.75mil (0.400mm)" at -892.15,2562.14 h51.89
  text "PTH" at 104.82,2562.14 h51.89
  text "Round" at 546.64,2562.14 h51.89
  text "Top Layer - Bottom Layer" at 1185.58,2562.14 h51.89
  text "Via" at 2485.14,2562.14 h51.89
  text "Rounded" at 2999.59,2562.14 h51.89
  text "(Mixed)" at 3648.9,2562.14 h51.89
  text "1626 Total" at -1456.84,2432.42 h51.89
  text "Top and bottom layers are intensionally stiched through vias, please dont generate exception for this." at 1964,70 h60

## Text inside footprints (layer, text, board x,y; h text height)
C13: Top Overlay "+" at 1151.62,-1268.86 h78.74 r135
P1: Bottom Overlay "1" at -1055.12,908.66 h59.06
P3: Top Overlay "2" at -804.13,-1468.5 h59.06; Top Overlay "1" at -544.29,-1466.54 h59.06
U4: Top Overlay "+" at -1755.91,-114.17 h32 r270
U7: Top Overlay "38" at -253.98,-1526.94 h47.24 r180; Top Overlay "24" at -221.5,-903.16 h47.24 r180; Top Overlay "15" at 229.29,-903.71 h47.24 r180; Top Overlay "1" at 258.82,-1526.94 h47.24 r180